# EAGLE board powerlolu (EAGLE 6.2)
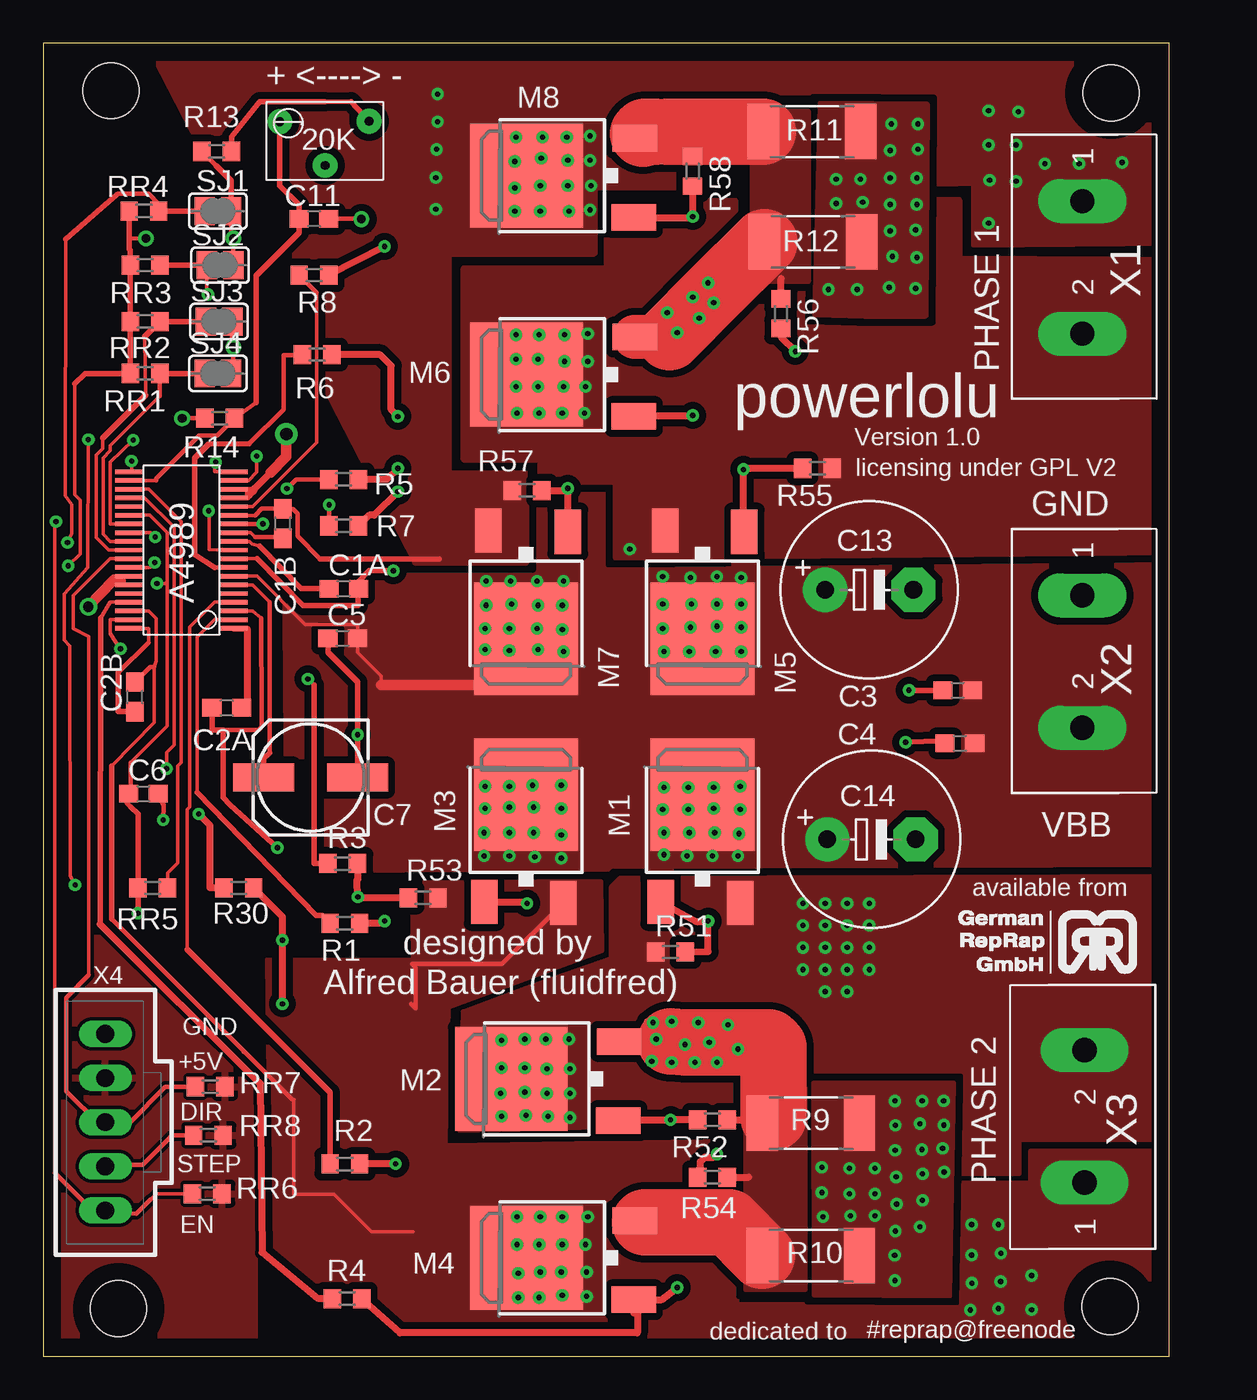
[diagram p0: board, top side]
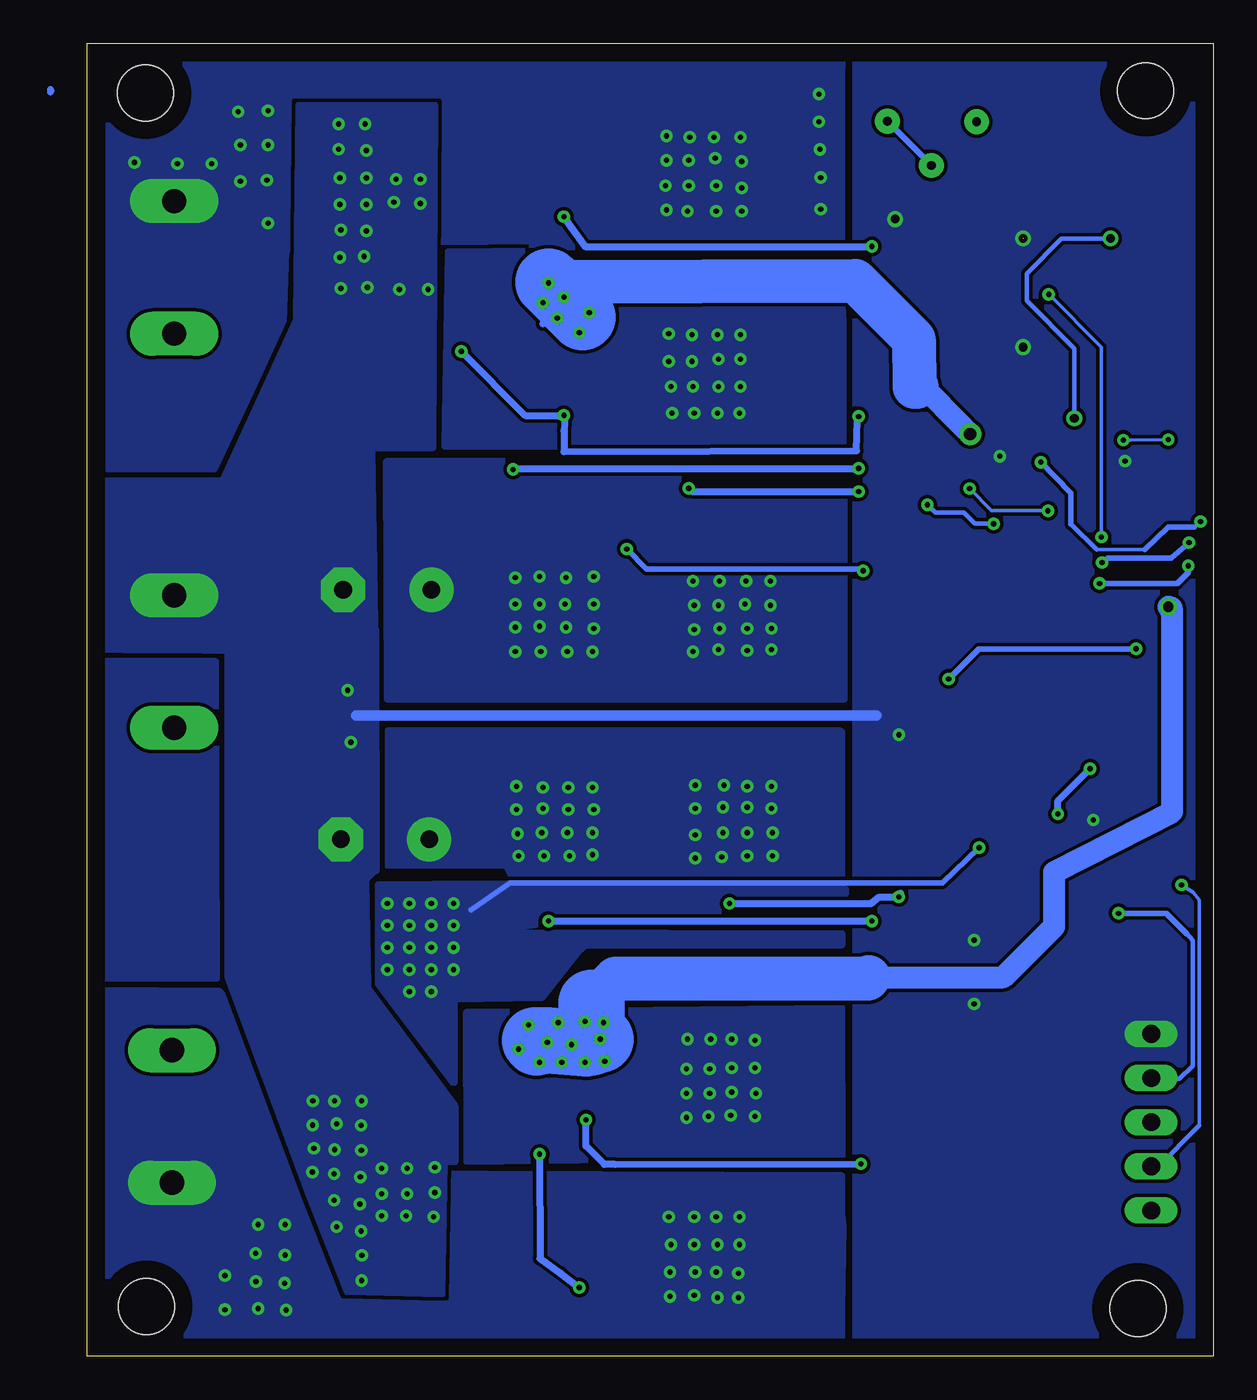
[diagram p1: board, bottom side, seen from below]

Size 64.76 x 75.49 mm. Coordinates in mm from the lower left corner, seen from the top.
Outline: 0,0 64.76,0 64.76,75.49 0,75.49 0,0
Copper layers (1*16): Top 0.035mm / dielectric 1.5mm / Bottom 0.035mm
Design rules: minimum track width 10mil, minimum drill 24mil, track to track 8mil, track to pad 8mil, pad to pad 8mil, via to via 8mil, smd to smd 8mil, copper to edge 40mil, drill to drill 8mil, minimum pad ring 10mil, minimum via ring 8mil, stop-mask expansion 4mil, vias tented up to drill 0mil, thermal gap 10mil
Holes 3.2 mm at 61.4,72.64 3.87,72.77 4.32,2.73 61.34,2.86

## Footprints (pad centres in the part's own frame; a part is rotated, then mirrored left to right if it is on the bottom)
TSSOP39 = smd 0.254 x 1.6: 1 -4.5,-3; 2 -4,-3; 3 -3.5,-3; 4 -3,-3; 5 -2.5,-3; 6 -2,-3; 7 -1.5,-3; 8 -1,-3; 9 -0.5,-3; 10 0,-3; 11 0.5,-3; 12 1,-3; 13 1.5,-3; 14 2,-3; 15 2.5,-3; 16 3,-3; 17 3.5,-3; 18 4,-3; 19 4.5,-3; 20 4.5,3; 21 4,3; 22 3.5,3; 23 3,3; 24 2.5,3; 25 2,3; 26 1.5,3; 27 1,3; 28 0.5,3; 29 0,3; 30 -0.5,3; 31 -1,3; 32 -1.5,3; 33 -2,3; 34 -2.5,3; 35 -3,3; 36 -3.5,3; 37 -4,3; 38 -4.5,3
C0603 = smd 1.1 x 1: 1 -0.85,0; 2 0.85,0
153CLV-0605 = smd 3.5 x 1.6: + 2.7,0; - -2.7,0
E5-10,5 = drill 1.016 pad 2.54: + -2.54,0 | drill 1.016 pad 2.54 octagon: - 2.54,0
TO252 = smd 1.524 x 2.54: 1 -2.407,-3.657; 2 2.153,-3.72 | smd 5.97 x 6.48: 3 0,2.5
R0603 = smd 1 x 1.1: 1 -0.85,0; 2 0.85,0
R2512 = smd 1.8 x 3.2: 1 -2.8,0; 2 2.8,0
SJ = smd 1.168 x 1.6: 1 -0.762,0; 2 0.762,0
BOURNS_3266W = drill 0.5 pad 1.422: 1 -1.77,1.4; 2 0.83,-1.12; 3 3.36,1.42
GMKDS32 = drill 1.397 pad 2.54 long: 1 -3.81,0; 2 3.81,0
70543-05 = drill 1.016 long: 1 -5.08,0; 2 -2.54,0; 3 0,0; 4 2.54,0; 5 5.08,0

## Placement (x,y rotation side)
A4989  A4989  [TSSOP39]  7.94,46.36 90 top
C1A  0.1u  [C0603]  17.27,44.13 0 top
C1B  0.1u  [C0603]  13.78,47.88 90 top
C2A  0.1u  [C0603]  10.54,37.27 180 top
C2B  0.1u  [C0603]  5.27,37.91 90 top
C3  0.1u  [C0603]  52.58,38.29 0 top
C4  0.1u  [C0603]  52.7,35.24 0 top
C5  0.1u  [C0603]  17.21,41.28 0 top
C6  0.1u  [C0603]  5.75,32.33 0 top
C7  10u  [153CLV-0605]  15.37,33.27 180 top
C11  0.1u  [C0603]  15.56,65.41 180 top
C13  100u  [E5-10,5]  47.5,44.07 0 top
C14  100u  [E5-10,5]  47.62,29.72 0 top
M1  IRLR024N  [TO252]  37.91,29.78 0 top
M2  IRLR024N  [TO252]  29.4,15.94 90 top
M3  IRLR024N  [TO252]  27.75,29.78 0 top
M4  IRLR024N  [TO252]  30.29,5.65 90 top
M5  IRLR024N  [TO252]  37.91,43.75 180 top
M6  IRLR024N  [TO252]  30.29,56.45 90 top
M7  IRLR024N  [TO252]  27.75,43.75 180 top
M8  IRLR024N  [TO252]  30.29,67.88 90 top
R1  33  [R0603]  17.34,24.89 180 top
R2  33  [R0603]  17.34,11.05 180 top
R3  33  [R0603]  17.21,28.32 0 top
R4  33  [R0603]  17.46,3.3 0 top
R5  33  [R0603]  17.27,50.42 180 top
R6  33  [R0603]  15.75,57.59 180 top
R7  33  [R0603]  17.27,47.75 0 top
R8  33  [R0603]  15.56,62.17 0 top
R9  0.1  [R2512]  44.13,13.4 0 top
R10  0.1  [R2512]  44.13,5.78 0 top
R11  0.1  [R2512]  44.2,70.42 0 top
R12  0.1  [R2512]  44.26,64.07 0 top
R13  10K  [R0603]  9.97,69.28 180 top
R14  22k  [R0603]  10.13,53.94 180 top
R30  10k  [R0603]  11.24,26.92 0 top
R51  470k  [R0603]  36.07,23.24 0 top
R52  470K  [R0603]  38.48,13.59 180 top
R53  470k  [R0603]  21.84,26.35 0 top
R54  470k  [R0603]  38.48,10.29 0 top
R55  470k  [R0603]  44.51,51.05 180 top
R56  470k  [R0603]  42.42,59.94 270 top
R57  470k  [R0603]  27.81,49.78 180 top
R58  470k  [R0603]  37.34,68.14 90 top
RR1  10K  [R0603]  5.84,56.52 180 top
RR2  10k  [R0603]  5.84,59.5 180 top
RR3  10k  [R0603]  5.84,62.74 180 top
RR4  10k  [R0603]  5.78,65.85 180 top
RR5  10K  [R0603]  6.29,26.92 180 top
RR6  10K  [R0603]  9.42,9.33 0 top
RR7  10K  [R0603]  9.59,15.49 0 top
RR8  10K  [R0603]  9.49,12.7 0 top
SJ1  [SJ]  10.03,65.85 0 top
SJ2  [SJ]  10.16,62.74 0 top
SJ3  [SJ]  10.1,59.5 0 top
SJ4  [SJ]  10.03,56.52 0 top
U$1  20K  [BOURNS_3266W]  15.37,69.6 0 top
X1  GMGDS32  [GMKDS32]  59.75,62.61 270 top
X2  GMGDS32  [GMKDS32]  59.75,39.94 270 top
X3  GMGDS32  [GMKDS32]  59.88,13.78 90 top
X4  C-GRID-05-70543  [70543-05]  3.56,13.45 90 top

## Library data of the parts
A4989 U$1 X1-X3 = myLib
C1A C1B C2A C2B C3-C6 C11 R1-R14 R30 R51-R58 RR1-RR8 = resistor
C7 C13 C14 = rcl
M1-M8 = to252(1)
SJ1-SJ4 = jumper
X4 = con-molex; OC_FARNELL: unknown; OC_NEWARK: unknown

## Nets
GND: A4989.18 A4989.20 C3.1 C4.1 C5.1 C6.2 C7.- C11.1 C13.- C14.- R9.2 R10.2 R11.2 R12.2 R13.2 R30.2 SJ1.2 SJ2.2 SJ3.2 SJ4.2 X2.1 X4.5
N$1: A4989.27 RR3.1 SJ2.1
N$2: A4989.29 RR2.1 SJ3.1
N$3: A4989.28 RR1.1 SJ4.1
N$6: M2.1 R2.1 R52.2
N$7: M1.1 R1.1 R51.2
N$8: M3.1 R3.2 R53.1
N$9: M4.1 R4.2 R54.1
N$10: M6.1 R6.1 R56.2
N$11: M5.1 R5.1 R55.2
N$12: M7.1 R7.2 R57.1
N$13: M8.1 R8.2 R58.1
N$15: A4989.23 R30.1
N$16: R13.1 U$1.2 U$1.3
N$18: A4989.22 RR5.1
N$19: A4989.21 C11.2 R14.1 U$1.1
N$20: A4989.37 R3.1
N$21: A4989.2 R1.2
N$22: A4989.35 R4.1
N$23: A4989.4 R2.2
N$24: A4989.26 RR8.1 X4.2
N$25: A4989.32 A4989.33 M2.2 M4.2 R9.1 R10.1 R52.1 R54.2
N$26: A4989.19 RR6.1 X4.1
N$27: A4989.10 R5.2
N$28: A4989.13 R7.1
N$29: A4989.15 R8.1
N$30: A4989.8 R6.2
N$31: A4989.12 C1B.1
N$32: A4989.16 A4989.17 M6.2 M8.2 R11.1 R12.1 R56.1 R58.2
N$33: A4989.31 RR4.1 SJ1.1
N$34: A4989.11 C1A.1
N$35: A4989.1 C2A.1
N$36: A4989.38 C2B.1
N$37: A4989.30 RR7.1 X4.3
N$38: A4989.25 C6.1 R14.2 RR1.2 RR2.2 RR3.2 RR4.2 RR5.2 RR6.2 RR7.2 RR8.2 X4.4
N$39: A4989.6 C7.+
P1+: A4989.9 C1A.2 M5.2 M6.3 R55.1 X1.2
P1-: A4989.14 C1B.2 M7.2 M8.3 R57.2 X1.1
P2+: A4989.3 C2A.2 M1.2 M2.3 R51.1 X3.2
P2-: A4989.36 C2B.2 M3.2 M4.3 R53.2 X3.1
VBB: A4989.7 C3.2 C4.2 C5.2 C13.+ C14.+ M1.3 M3.3 M5.3 M7.3 X2.2

## Tracks (layer width: path | path; a pad name or v marks a point on that pad's centre or on a via)
GND  (via drill 0.3, 0.3 pad 0.71, 0.5)  (1 unrouted)
  Top 0.203: A4989.18 11.8,50.36 12.27,50.83 v12.27,51.75 | v5.07,51.47 5.07,50.86 A4989.20
  Top 0.254: C11.1 v18.29,65.41 v18.29,65.39 | SJ4.2 10.92,56.51 v10.92,58.03 10.92,58.1 10.86,58.1 SJ3.2 | SJ2.2 10.92,64.3 10.79,64.35 SJ1.2 | 9.92,68.47 R13.2 | C6.2 6.91,31.67 v6.88,30.83
  Top 0.305: C7.- v18.07,35.74 18.07,38.76 16.36,40.47 C5.1 | SJ1.2 10.79,67.6 9.92,68.47 | C3.1 v49.78,38.29 | C4.1 51.66,35.37 v49.59,35.31
  Top 0.406: R30.2 13.74,25.27 v13.74,23.91 v13.74,20.26
  Bottom 0.203: v13.74,20.26 13.74,20.15 13.69,20.21
  Bottom 0.254: v18.29,65.39 18.34,65.39 18.34,65.42
  Bottom 0.61: 49.28,36.83 19.37,36.83
  other vias: 50.29,70.87 48.7,69.34 46.35,9.33 47.82,9.33 46.42,8.06 44.77,9.4 47.82,8.06 48.77,70.87 50.29,69.41 46.99,67.69 45.59,67.69 45.59,66.29 48.7,66.23 48.7,67.75 44.77,10.86 46.35,10.79 47.82,10.79 44.83,8 48.97,14.67 50.53,14.67 51.71,11.95 51.78,14.68 50.41,13.36 49,13.27 48.98,11.84 50.52,11.87 49.05,10.3 51.79,13.28 49.07,8.74 50.56,10.48 50.56,8.95 49,7.19 48.96,5.79 48.97,4.34 47.12,66.36 48.7,64.71 50.23,67.75 50.23,66.23 50.16,64.77 50.23,63.18 48.83,63.25 45.15,61.34 46.8,61.34 48.64,61.47 50.16,61.4 50.41,7.43 51.8,10.58 10.92,64.27
  pour Bottom (isolate 0.254, rank 2, no thermals): 52.58,71.95 44.77,71.95 44.88,52.22 48.41,52.18 48.22,42.02 48.96,40.51 67.27,40.64 67.25,50.74 66.87,50.36 56.96,50.36 52.7,59.63
  pour Bottom (no thermals): 48.16,41.78 48.13,27.9 48.23,27.9 48.74,27.39 48.64,21.15 43.61,14.36 43.61,11.16 44.22,11.16 44.36,3.54 49.78,3.68 52.01,9.4 56.65,21.79 56.64,41.4 56.64,41.72
  pour Top (no thermals): 50.74,59.88 50.8,71.95 44.7,72.01 44.39,59.94 47.18,59.88
  pour Top (no thermals): 44.32,3.49 52.15,3.43 52.37,15.71 44.27,15.71
  pour Bottom (no thermals): 1.65,74.61 20.57,74.61 20.57,0.64 -1.71,0.44 -1.4,74.68
N$1  (via drill 0.3 pad 0.71)
  Top 0.203: A4989.27 6.17,47.36 v6.42,47.1 | v9.45,61.07 9.4,61.12 SJ2.1
  Top 0.305: SJ2.1 RR3.1
  Bottom 0.203: v9.45,61.07 6.42,58.03 v6.42,47.1
N$2
  Top 0.203: 5.84,58.51 5.89,55.27 | 3.4,52.79 3.4,52.2 3.02,51.81 3.02,47.08 3.74,46.36 A4989.29
  Top 0.254: 5.84,58.51 5.84,58.64
  Top 0.305: 5.89,55.27 3.4,52.79 | SJ3.1 RR2.1 5.84,58.64
N$3
  Top 0.203: 6.69,55.22 3.85,52.37 3.85,52.06 3.43,51.64 3.43,47.26 3.83,46.86 A4989.28
  Top 0.254: RR1.1 6.69,55.22
  Top 0.305: SJ4.1 RR1.1
N$4
  pour Bottom (no thermals): 64.4,21.74 57.3,21.73 57.37,39.94 63.7,39.94
N$6  (via drill 0.3 pad 0.71)
  Top 0.406: M2.1 33.12,13.59 v36.07,13.59 R52.2 | v20.26,11.05 R2.1
  Bottom 0.406: v20.26,11.05 34.39,11.02 35.01,11.02 36.07,12.08 v36.07,13.59
N$7  (via drill 0.3 pad 0.71)
  Top 0.406: M1.1 37.59,24.98 v38.23,25.02 38.23,23.27 R51.2 | v19.62,25.02 19.49,24.89 R1.1
  Bottom 0.406: v38.23,25.02 v19.62,25.02
N$8  (via drill 0.3 pad 0.71)
  Top 0.406: R53.1 18.23,26.35 v18.08,26.4 18.03,27.36 18.06,27.36 R3.2 | M3.1 27.81,26.12 v27.81,26.04
  Bottom 0.406: 17.97,26.61 v18.08,26.4 19.21,26.4 19.62,26.1 19.62,26.04 v27.81,26.04
N$9  (via drill 0.3 pad 0.71)
  Top 0.406: v36.45,3.94 35.55,3.24 M4.1 33.95,2.48 34.16,2.48 34.16,1.33 20.51,1.33 R4.2 | R54.1 37.78,10.92 37.78,11.18 38.04,11.43 38.54,11.43 v38.73,11.62
  Bottom 0.406: v38.73,11.62 38.72,5.61 37.53,4.76 v36.45,3.94
N$10  (via drill 0.3 pad 0.71)
  Top 0.406: M6.1 34,54.1 v37.34,54.1 | v20.38,54.04 20,54.42 20,56.96 19.37,57.59 R6.1 | R56.2 42.42,58.61 v43.24,57.79
  Bottom 0.406: v20.38,54.04 20.45,53.85 20.51,52.07 37.34,52.01 37.34,53.21 37.27,54.04 v37.34,54.1 39.56,54.1 v43.24,57.79
N$11  (via drill 0.3 pad 0.71)
  Top 0.406: M5.1 40.26,47.47 v40.26,50.99 40.2,51.05 R55.2 | v20.38,51.05 19.75,50.42 R5.1
  Bottom 0.406: v40.26,50.99 40.2,51.05 v20.38,51.05
N$12  (via drill 0.3 pad 0.71)
  Top 0.406: v20.38,49.72 19.03,48.37 18.73,48.37 R7.2 | R57.1 30.16,49.78 | 30.16,49.78 v30.16,49.91 | M7.1 30.16,49.78
  Bottom 0.406: v30.16,49.91 29.97,49.72 v20.38,49.72
N$13  (via drill 0.3 pad 0.71)
  Top 0.406: M8.1 37.34,65.47 v37.34,65.53 R58.1 | v19.62,63.82 R8.2
  Bottom 0.406: v37.34,65.53 37.34,65.47 36.13,63.82 v19.62,63.82
N$15  (via drill 0.3 pad 0.71)
  Top 0.203: v7.07,33.78 7.07,34.72 7.51,35.15 7.51,47.66 5.82,49.36 A4989.23
  Top 0.406: R30.1 9.59,26.92 9.59,30.52 v8.93,31.18
  Bottom 0.406: v8.93,31.18 8.93,31.93 v7.07,33.78
N$16
  Top 0.254: 16.18,72.15 17.69,72.15
  Top 0.305: R13.1 10.82,70.13 12.43,72.15 16.18,72.15 | 17.69,72.15 U$1.3
  Bottom 0.203: U$1.2
  Bottom 0.305: U$1.3 U$1.2
N$18
  Top 0.203: A4989.22 6.04,49.86 7.92,47.98 7.92,34.13 7.73,33.95 7.73,28.37 7.14,27.78 RR5.1
N$19
  Top 0.203: A4989.21 6.49,50.36 | 12.24,62.06 12.24,62.13
  Top 0.254: 6.49,50.36 6.49,50.47 8.91,52.9 8.91,52.92 8.94,52.95 9.99,52.95 R14.1 12.24,54.84
  Top 0.305: 12.24,62.13 14.71,64.6 C11.2 14.71,66.21 13.6,67.32 U$1.1 | 12.24,54.84 12.24,62.06
N$20  (via drill 0.3 pad 0.71)
  Top 0.203: A4989.37 3.83,42.36 3.83,41.55 v4.43,40.68 | 15.55,38.6 v15.21,38.94
  Top 0.305: R3.1 15.55,28.32 15.55,38.6
  Bottom 0.305: v15.21,38.94 13.48,40.68 v4.43,40.68
N$21
  Top 0.203: 8.84,32.43 8.84,41.36 9.83,42.36 A4989.2
  Top 0.254: 16.02,25.35 R1.2
  Top 0.305: 8.84,32.43 15.68,25.35 16.02,25.35
N$22
  Top 0.203: 3.28,42.45 3.83,43.36 A4989.35 | 12.39,15.75 12.47,15.68
  Top 0.305: 3.28,42.45 3.25,24.84
  Top 0.406: 3.25,24.84 12.39,15.75 | 12.47,15.68 12.57,5.96 15.81,3.3 R4.1
N$23
  Top 0.203: 8.27,23.39 8.27,31.45 8.4,31.58 8.4,41.92 9.83,43.36 A4989.4
  Top 0.305: R2.2 16.48,15.17 8.27,23.39
N$24  (via drill 0.3 pad 0.71)
  Top 0.203: A4989.26 3.83,47.86 3.83,51.43 v5.17,52.68 | v2.58,52.71 2.56,45.34 1.19,43.82 1.19,41.17 1.52,40.83 1.54,27.6 v1.82,27.1
  Top 0.254: X4.2 3.66,11.01 5.71,11.01 7.4,12.7 RR8.1
  Bottom 0.203: v5.17,52.68 4.76,52.69 v2.58,52.71 | 0.78,13.26 0.78,26.24 1.15,26.66 v1.82,27.1
  Bottom 0.254: 0.78,13.26 3.24,10.81 X4.2
N$25  (via drill 0.3 pad 0.71, 0.6 pad 1.01)
  Top 0.203: 2.58,43.1 v2.58,43.09 | 4.03,44.38 A4989.33 | 3.96,44.55 4.03,44.38 | 4.03,44.38 4.01,44.61
  Top 0.254: v37.47,16.89 37.59,16.89 37.78,17.08 | 38.48,19.21 38.48,18.03 | A4989.32 4.93,44.87 4.01,44.84 4.62,44.53 4.62,44.54 4.62,44.64 4.01,44.61
  Top 0.406: M2.2 34.61,18.09 | 34.61,18.09 v35.24,18.22 | 39.5,18.1 39.54,18.03 40.01,17.4 | 34.61,7.68 34.13,7.68 M4.2 | R54.2 40.58,10.29 | R52.1 41.14,13.59 | 36.07,18.1 36.07,18.92 36.13,18.48 v37.66,19.18 36.39,19.37 v36.13,19.24 36.13,19.11 | 34.73,19.24 v35.05,19.18 | 37.02,18.03 v36.89,17.91 35.81,18.03 35.24,18.03 | v39.37,19.05 39.33,19.05 | 39.33,19.05 39.43,18.03 39.43,17.45 | 39.33,19.05 39.31,19.3 | 34.61,18.09 34.61,18.03 35.24,18.03 | v34.99,16.95 35.24,17.21 35.24,18.03 | v39.94,17.65 39.93,17.65 40.01,17.4 | 38.04,17.4 38.04,16.64 | 37.78,17.08 37.78,17.59 38.04,17.4 | 39.12,16.83 38.52,17.11 | v38.73,16.89 38.52,17.11 | 38.52,17.11 38.06,17.57 | 38.06,17.57 38.04,17.59 38.04,17.4 | 38.06,17.57 39.43,17.45 | 40.01,17.4 39.5,17.27 39.43,17.21 39.43,17.45 | 38.67,18.99 38.48,19.21 38.29,19.43
  Top 0.61: 4.01,44.61 2.58,43.1
  Top 3.81: 36.07,18.1 36.89,18.03 37.02,18.03 v38.29,18.03 38.48,18.03 39.43,18.03 | R10.1 39.43,7.68 34.61,7.68 | 41.97,13.72 41.97,17.78 41.72,18.03 39.54,18.03
  Bottom 0.254: 35.75,19.19 34.84,19.19 v35.05,19.18 | v36.13,16.89 35.05,16.89 v34.99,16.95
  Bottom 1.27: 2.35,42.86 v2.58,43.09 | 2.35,42.86 2.38,43.04 | 19.81,21.78 12.06,21.78 9.14,24.7 9.14,27.83 2.35,31.31 2.35,42.86
  Bottom 2.54: 35.75,20.32 34.35,21.72 19.88,21.72 19.81,21.78
  Bottom 3.81: 38.92,18.03 38.29,18.16 | 38.99,18.16 38.29,18.16 | v35.24,18.22 35.75,18.07 | 38.29,18.16 36.07,17.97 35.75,18.03 35.75,18.07 | 35.75,18.07 35.75,19.19 35.75,20.32
  pour Top (no thermals): 40.51,15.37 40.39,15.37 40.39,3.81 43.81,3.81 43.81,15.43 40.51,15.43
N$26  (via drill 0.3 pad 0.71)
  Top 0.203: v0.72,47.99 0.64,47.68 0.65,10.52 | v9.91,51.41 9.83,51.33 9.83,50.86 A4989.19 | RR6.1 6.47,9.33 6.16,9.02
  Top 0.254: 6.16,9.02 5.33,8.19 X4.1 2.91,8.27 0.65,10.52
  Bottom 0.203: 6.69,46.4 3.93,46.4 | 1.07,47.69 v0.72,47.99
  Bottom 0.254: 8.17,47.85 6.69,46.4
  Bottom 0.305: v9.91,51.41 8.17,49.64 8.17,47.85 | 3.93,46.4 2.56,47.69 1.07,47.69
N$27  (via drill 0.3 pad 0.71)
  Top 0.203: v9.5,48.61 9.53,48.48 9.53,46.38 A4989.10 | 14.2,49.89 v14,49.89
  Top 0.254: R5.2 14.53,50.42 v14,49.89
  Bottom 0.203: v14,49.89 12.74,48.64 v9.5,48.61
N$28  (via drill 0.3)
  Top 0.254: R7.1 v16.42,48.95 v16.43,48.96 | v12.62,47.87 12.61,47.86 A4989.13
  Bottom 0.254: v16.43,48.96 15.98,48.5 14.33,48.5 13.69,47.87 v12.62,47.87
N$29
  Top 0.203: 15.7,61.17 15.7,52.53 12.04,48.87 12.04,48.86 A4989.15
  Top 0.254: 15.7,61.17 R8.1
N$30
  Top 0.254: 11.84,52.49 13.82,54.44 13.82,57.57 14.9,57.57 R6.2 | A4989.8 9.83,45.36
  Top 0.305: 11.84,52.49 9.5,52.46 8.89,51.85 8.71,51.65 8.71,46.1 9.83,45.36
N$31
  Top 0.203: A4989.12 11.92,47.36 12.17,47.1
  Top 0.254: 12.17,47.1 13.7,47.1 C1B.1
N$32  (via drill 0.3 pad 0.71, 0.7 pad 1.27)
  Top 0.254: 11.99,49.78 A4989.17 10.9,49.85 11.68,49.82 | 38.54,61.16 v38.54,60.58 | 11.73,49.36 11.78,49.36 A4989.16
  Top 0.305: 11.68,49.82 11.73,49.82 11.73,49.36
  Top 0.406: 13.06,50.82 13.06,50.84 13.06,50.81 12.14,49.9 12.09,49.8 12.12,49.77 | 12.12,49.77 11.89,49.59 11.91,49.59 12.12,49.8 12.12,49.77 | 12.12,49.77 11.84,49.52 11.91,49.8 11.99,49.78 | 35.99,58.6 36.45,58.6 v36.45,58.86 | R56.1 42.42,61.98 | R58.2 35.9,70.42 35.18,70.42 | 34.48,70.29 34.22,70.03 M8.2
  Top 0.61: 13.06,50.82 13.97,51.73 v13.97,53.02
  Top 2.54: 35.99,58.6 M6.2
  Top 3.81: 35.18,70.42 34.61,70.42 34.48,70.29 | R11.1 35.9,70.42 | 35.99,58.6 38.54,61.16 R12.1
  Bottom 0.203: 17.17,55.75 16.7,55.75 | v13.97,53.02 14.41,53.47
  Bottom 0.406: 38.23,61.79 v38.23,61.72 | v37.72,59.69 36.39,59.69 | 36.45,59.37 v36.45,58.86 | 36.39,59.69 36.39,59.37 36.45,59.37 | 36.45,59.37 38.54,59.37 | 36.39,59.69 36.27,59.76 v35.88,60.01
  Bottom 1.27: 16.7,55.75 14.41,53.47 v13.97,53.02
  Bottom 2.54: 38.23,61.79 20.57,61.85 17.21,58.48 17.17,55.75 17.06,55.75
  Bottom 3.81: v37.34,60.9 38.23,61.79 | v38.23,61.72 36.27,59.76
  pour Top (no thermals): 41.02,71.56 43.94,71.56 43.94,61.85 40.83,61.85 40.83,71.37
N$33  (via drill 0.3 pad 0.71)
  Top 0.203: 1.27,64.23 1.26,49.48 1.64,48.97 1.63,47.3 v1.38,46.78 | A4989.31 6.04,45.36 6.17,45.37 v6.39,45.64
  Top 0.254: 4.22,66.78 4.28,66.84 6.04,66.84 6.63,66.26 RR4.1
  Top 0.305: 4.22,66.78 1.27,64.23 | SJ1.1 RR4.1
  Bottom 0.203: 6.07,45.89 v6.39,45.64
  Bottom 0.305: v1.38,46.78 2.4,45.89 6.07,45.89
N$34
  Top 0.203: A4989.11 11.85,46.86 12.01,46.7 12.43,46.6
  Top 0.305: 12.43,46.6 14.82,44.13 C1A.1
N$35
  Top 0.254: 11.73,41.8 10.94,41.8 A4989.1
  Top 0.406: C2A.1 11.73,37.27 11.73,41.8
N$36
  Top 0.203: A4989.38 6.04,41.86 6.04,41.04
  Top 0.254: 4.29,39.31 6.04,41.04
  Top 0.305: C2B.1 4.29,37.06 4.29,39.31
N$37
  Top 0.203: 2.62,21.91 2.62,41.37 1.72,41.84 1.72,43.74 3.83,45.86 A4989.30
  Top 0.254: 2.62,21.91 1.32,20.61 1.32,15.23 3.2,13.35 X4.3 4.98,13.45 7.01,15.48 8.73,15.48 RR7.1
N$38  (via drill 0.3, 0.5)
  Top 0.203: 7.1,44.54 7.1,47.35 6.1,48.36 A4989.25 | 7.1,44.54 7.1,36.24 5,34.14 | 4.93,63.66 4.99,63.59 | v5.44,25.46 | 1.8,55.92 1.8,49.54 2.11,49.24 2.11,46.14 v1.42,45.45 | v6.53,44.44 7,44.44 7.1,44.54
  Top 0.254: R14.2 v7.98,53.94 | v5.89,64.27 4.93,64.3 | 5,34.14 5,32.43 C6.1 4.8,31.81 5.03,31.58
  Top 0.305: 5.03,31.58 5.44,31.17 RR5.2 v5.44,25.46 | 4.99,63.59 RR3.2 RR2.2 RR1.2 2.4,56.51 1.8,55.92 | RR4.2 4.93,64.3 4.93,63.66
  Bottom 0.203: v1.42,45.45 1.42,45.07
  Bottom 0.254: v7.98,53.94 7.98,57.95 10.72,60.69 10.72,62.24 8.74,64.27 v5.89,64.27 | 1.5,24.27 1.25,24.02 1.25,23.99 1.17,23.91 1.17,16.7 1.93,15.94 2.97,15.94 X4.4
  Bottom 0.305: 1.5,24.27 2.69,25.46 v5.44,25.46 | 1.42,45.07 2.06,44.44 v6.53,44.44
  pour Top: 0.15,24.04 12.12,24.04 12.12,0.22 0.15,0.22
N$39
  Top 0.203: 13.02,43.37 12.04,44.36 A4989.6
  Top 0.254: 13.02,34.68 13.02,43.37
  Top 0.305: C7.+ 12.67,34.38 13.02,34.68
N$80
  Bottom 0.406: 66.86,72.83 66.86,72.71
P1+  (via drill 0.3 pad 0.71)
  Top 0.203: 12.29,45.86 A4989.9 | 18.12,44.55 C1A.2
  Top 0.305: C1A.2 18.1,43.18 14.95,43.18 12.29,45.86 | 18.12,44.55 18.74,45.16 v20.13,45.16
  Bottom 0.254: v20.13,45.16 20.13,45.28
  Bottom 0.305: 20.13,45.28 32.58,45.28 v33.72,46.42
  other vias: 27.18,58.74 27.18,57.34 27.18,55.75 27.24,54.23 28.51,58.74 28.45,57.34 28.45,55.75 28.51,54.23 29.84,54.23 29.91,55.75 29.97,57.21 29.97,58.74 31.31,58.8 31.31,57.21 31.18,55.75 31.11,54.23
  pour Top (isolate 0.406, rank 2, no thermals): 71.12,46.29 32.96,45.91 32.96,50.29 28.57,50.29 28.64,51.56 24.19,51.56 24.19,62.55 32.45,62.55 32.45,66.42 39.75,66.42 39.75,61.09 48.7,61.09 48.7,61.59 48.77,61.59 48.77,66.48 52.64,66.48 52.64,63.12 70.61,62.99
  pour Bottom: 21.53,63.75 44.01,63.5 44.2,52.32 21.27,52.32 21.27,59.5
P1-  (via drill 0.3 pad 0.71)
  Top 0.203: A4989.14 12.17,48.35
  Top 0.254: 15.92,45.85 14.61,47.15 14.61,48.45 14.35,48.7 13.8,48.7 C1B.2 12.55,48.73 12.17,48.35 | A4989.14
  Top 0.305: 22.76,45.85 15.92,45.85
  other vias: 27.18,70.1 28.7,70.1 30.1,70.1 31.43,70.17 31.43,68.77 30.16,68.77 28.64,68.9 27.11,68.71 27.11,67.18 28.57,67.31 30.16,67.31 31.5,67.31 31.43,65.91 30.23,65.85 28.57,65.85 27.11,65.85 22.67,72.58 22.67,70.99 22.62,69.4 22.57,67.78 22.57,65.96 54.36,71.63 54.36,69.66 54.42,67.63 54.36,65.15 56.07,71.56 55.94,69.66 55.94,67.56 57.59,68.58 59.56,68.58 62.04,68.64
  pour Top (isolate 0.406, rank 2, no thermals): 21.4,45.66 27.75,45.66 27.75,50.74 23.3,50.74 23.3,63.44 31.69,63.44 31.69,67.25 39.94,67.25 39.94,72.71 48.9,72.71 49.02,72.64 48.83,72.64 48.83,67.37 53.53,67.5 53.53,63.94 65.09,64.07 64.96,74.87 5.96,75.53
  pour Bottom (rank 3, no thermals): 21.27,74.49 63.5,74.42 63.69,63.82 63.69,52.26 63.63,51.05 57.43,51.02 53.47,59.45 53.31,63.59 21.34,64.01 21.34,73.98
P2+  (via drill 0.3 pad 0.71)
  Top 0.203: 12.52,42.43 12.04,42.86 A4989.3
  Top 0.254: 12.52,42.43 12.54,36.85 12.55,36.85 12.55,36.21 12.52,36.18 12.52,36.16 12.38,36.01 10.33,36.01
  Top 0.305: v13.46,29.23 10.73,31.7 10.33,32.12 10.33,36.01 9.69,36.01 C2A.2
  Bottom 0.305: v13.46,29.23 15.56,27.21 40.43,27.21 42.67,25.65
  other vias: 26.35,18.16 27.69,18.22 28.89,18.22 30.23,18.22 30.29,16.51 28.96,16.51 27.69,16.57 26.35,16.57 26.29,15.11 27.69,15.18 28.96,15.11 30.29,15.11 30.29,13.72 29.02,13.78 27.75,13.84 26.35,13.78 47.5,22.22 47.5,23.49 47.5,24.76 47.5,26.04 46.23,26.04 46.23,24.76 46.23,23.49 46.23,22.22 44.96,22.22 44.96,20.95 44.96,23.49 44.96,24.76 44.96,26.04 43.69,26.04 43.69,24.76 43.69,23.49 43.69,22.22 46.23,20.95
  pour Top (isolate 0.406, rank 2, no thermals): 66.99,10.54 66.93,27.62 33.15,27.5 32.64,26.99 32.64,22.86 28,21.27 24.19,19.81 24.13,19.81 23.94,12.95 32.07,13.14 32.07,10.03 39.88,10.03 39.81,15.94 48.51,15.88 48.51,10.48 56.13,10.48 56.13,12.45 63.69,12.45 63.69,10.48
  pour Bottom: 21.34,20 42.95,19.76 42.93,11.19 21.31,11.49
  pour Bottom: 21.15,26.86 21.16,26.86 21.16,26.56 28.22,26.61 28.22,25.53 33.85,25.53 41.4,24.45 41.33,24.45 41.33,24.37 21.36,24.32 21.36,23.62 36.13,23.62 36.54,23.28 38.62,20.61 43.65,20.51 43.66,15.68 48.01,21.4 48.01,27.11 41.78,27.18
P2-  (via drill 0.3 pad 0.71)
  Top 0.203: 3.92,33.95 6.38,36.43 6.38,39.64 6.49,39.98 6.49,42.41 6.04,42.86 A4989.36 | 11.52,17.53 11.52,17.5 | 14.39,14.73 14.39,11.63 14.38,10.22 14.38,9.33 14.4,9.31 16.71,9.31 18.89,7.13 21.26,7.13
  Top 0.254: M3.2 26.38,22.54 21.21,22.54 21.4,22.35 21.4,20 21.14,20.26 | 6.38,39.64 6.15,39.64 C2B.2 | 3.92,25.15 11.57,17.5 | 14.39,14.73 14.34,14.73 11.57,17.5 | 11.57,17.5 11.52,17.5
  Top 0.305: 3.92,33.95 3.92,25.15
  other vias: 27.24,8 28.57,8 29.84,8 31.31,8 27.24,6.41 28.51,6.41 29.84,6.41 31.18,6.41 31.24,4.83 29.78,4.83 28.57,4.83 27.3,4.76 27.3,3.37 28.51,3.37 29.84,3.49 31.24,3.43 53.38,7.56 54.93,7.56 55.07,5.91 53.38,5.8 53.4,4.19 55.05,4.28 54.93,2.73 53.31,2.64 56.83,2.67 56.83,4.64
  pour Top (isolate 0.406, rank 2, no thermals): 21.27,22.8 21.21,27.24 28.38,27.3 32.07,27.3 32.13,23.3 23.3,20.07 23.11,12.13 39.81,12.38 39.88,2.98 48.51,2.98 48.51,3.37 48.45,3.37 48.45,9.97 56.77,9.97 56.77,11.81 63.82,11.81 63.82,11.94 66.93,11.94 66.93,-0.44 13.14,-0.04 12.88,22.81
  pour Bottom (rank 2, no thermals): 21.34,8.19 21.34,10.35 48.58,10.48 57.12,20.97 64.14,21.03 64.14,10.35 63.94,10.35 64.26,1.27 49.53,1.08 35.12,0.83 28.32,0.89 21.34,0.95 21.34,2.67 21.27,7.49
VBB  (via drill 0.3 pad 0.71)
  Top 0.203: A4989.7 12.28,44.86 15.05,42.08 18.06,42.08 C5.2 18.06,40.47 19.43,39.1 19.43,38.61
  Top 0.61: 25.11,38.61 19.43,38.61
  other vias: 25.4,32.77 26.8,32.77 28.13,32.83 29.78,32.83 29.78,31.5 29.78,29.97 29.78,28.64 28.19,31.56 28.19,30.1 28.26,28.7 26.8,31.56 26.8,30.1 26.8,28.77 25.34,28.77 25.34,30.1 25.4,31.5 35.69,32.7 37.08,32.7 38.54,32.7 40.07,32.77 35.62,31.43 37.08,31.43 38.54,31.5 40.07,31.43 40.01,30.04 38.61,30.1 37.15,30.1 35.69,30.1 35.69,28.83 37.02,28.77 38.48,28.77 39.94,28.77 25.46,44.58 26.86,44.58 28.38,44.58 29.91,44.58 29.84,43.18 28.45,43.18 26.92,43.24 25.46,43.18 25.4,41.85 26.8,41.85 28.38,41.85 29.84,41.78 29.91,40.51 28.45,40.64 26.8,40.58 25.4,40.64 35.62,44.83 37.21,44.77 38.73,44.83 40.13,44.77 35.62,43.24 37.27,43.24 38.73,43.24 40.13,43.24 40.13,41.91 38.73,41.97 37.21,41.91 35.62,41.85 35.69,40.51 37.15,40.51 38.67,40.51 40.13,40.51
  pour Top (isolate 0.406, rank 3, no thermals): 13.91,49.62 67.75,49.47 67.63,28.19 14.08,27.95
  pour Bottom (no thermals): 21.4,35.94 47.46,35.97 47.46,28.21 40.7,28.26 38.8,24.45 21.34,23.62 21.34,35.88
  pour Bottom (no thermals): 21.21,51.44 47.56,51.44 47.5,37.78 21.21,37.78

## Text on the board
tPlace: + <----> - | PHASE 1 | powerlolu | Version 1.0 | licensing under GPL V2 | GND | A4989 | VBB | available from | designed by | Alfred Bauer (fluidfred) | GND | +5V | DIR | STEP | PHASE 2 | EN | dedicated to | #reprap@freenode
tValues: P1- | P1+ | P2+ | P2-